# EAGLE board headstage-neuropix-64 (EAGLE 9.4.2)

Size 43.4 x 49.79 mm. Coordinates in mm from the lower left corner, seen from the top.
Outline: 0,0 43.4,0 43.4,49.79 0,49.79 0,0
Copper layers (1*16): Top 0.035mm / dielectric 1.5mm / Bottom 0.035mm
Design rules "default": minimum track width 6mil, minimum drill 0.35mm, track to track 6mil, track to pad 6mil, pad to pad 6mil, via to via 6mil, smd to smd 6mil, copper to edge 40mil, drill to drill 6mil, minimum pad ring 10mil, minimum via ring 8mil, stop-mask expansion 4mil, vias tented up to drill 0mil, thermal gap 10mil
Net classes: 1 thick: width 0.1 mm; 2 diff: width 0.076 mm, drill 0.1 mm, clearance 0.051 mm

## Footprints (pad centres in the part's own frame; a part is rotated, then mirrored left to right if it is on the bottom)
0201T = smd 0.3 x 0.4: 1 -0.3,0; 2 0.3,0
0402T = smd 0.4 x 0.6: 1 -0.533,0; 2 0.533,0
LED-0201T = smd 0.2 x 0.35: 1 -0.2,0; 2 0.2,0
0402T-DFN = smd 0.35 x 0.6: A -0.325,0; C 0.325,0
X_FL_R_SMT_1(02) = smd 0.5 x 0.7: P$1 0,-1.1 | smd 0.6 x 1.5: P$2 -1,0; P$4 1,0 | smd 0.5 x 0.6: P$3 0,1
2X05 = drill 1.016 octagon: 1 -5.08,-1.27; 2 -5.08,1.27; 3 -2.54,-1.27; 4 -2.54,1.27; 5 0,-1.27; 6 0,1.27; 7 2.54,-1.27; 8 2.54,1.27; 9 5.08,-1.27; 10 5.08,1.27
0603T = smd 0.7 x 0.9: 1 -0.82,0; 2 0.82,0
1210T = smd 1.5 x 2.5: 1 -1.3,0; 2 1.3,0
0805T = smd 0.7 x 1.3: 1 -1,0; 2 1,0
FE18-2 = drill 0.914: 1 -21.59,1.27 | drill 0.914 octagon: 2 -21.59,-1.27; 3 -19.05,1.27; 4 -19.05,-1.27; 5 -16.51,1.27; 6 -16.51,-1.27; 7 -13.97,1.27; 8 -13.97,-1.27; 9 -11.43,1.27; 10 -11.43,-1.27; 11 -8.89,1.27; 12 -8.89,-1.27; 13 -6.35,1.27; 14 -6.35,-1.27; 15 -3.81,1.27; 16 -3.81,-1.27; 17 -1.27,1.27; 18 -1.27,-1.27; 19 1.27,1.27; 20 1.27,-1.27; 21 3.81,1.27; 22 3.81,-1.27; 23 6.35,1.27; 24 6.35,-1.27; 25 8.89,1.27; 26 8.89,-1.27; 27 11.43,1.27; 28 11.43,-1.27; 29 13.97,1.27; 30 13.97,-1.27; 31 16.51,1.27; 32 16.51,-1.27; 33 19.05,1.27; 34 19.05,-1.27; 35 21.59,1.27; 36 21.59,-1.27
TP09R = smd 0.9 x 0.9: TP 0,0
TP06R = smd 0.6 x 0.6: TP 0,0
WQFN32-5X5 = smd 0.25 x 0.6: 1 1.75,2.4; 2 1.25,2.4; 3 0.75,2.4; 4 0.25,2.4; 5 -0.25,2.4; 6 -0.75,2.4; 7 -1.25,2.4; 8 -1.75,2.4; 17 -1.75,-2.4; 18 -1.25,-2.4; 19 -0.75,-2.4; 20 -0.25,-2.4; 21 0.25,-2.4; 22 0.75,-2.4; 23 1.25,-2.4; 24 1.75,-2.4 | smd 0.6 x 0.25: 9 -2.4,1.75; 10 -2.4,1.25; 11 -2.4,0.75; 12 -2.4,0.25; 13 -2.4,-0.25; 14 -2.4,-0.75; 15 -2.4,-1.25; 16 -2.4,-1.75; 25 2.4,-1.75; 26 2.4,-1.25; 27 2.4,-0.75; 28 2.4,-0.25; 29 2.4,0.25; 30 2.4,0.75; 31 2.4,1.25; 32 2.4,1.75 | smd 3.1 x 3.1: PAD 0,0
X2SON = smd 0.1 x 0.1: 1 -0.43,0.33; 2 -0.43,-0.33; 3 0.43,-0.33; 4 0.43,0.33 | smd 0.1 x 0.1 rotated 45: PAD 0,0
VBGA81-4X4 = smd 0.23 x 0.23: A1 1.6,1.6; A2 1.2,1.6; A3 0.8,1.6; A4 0.4,1.6; A5 0,1.6; A6 -0.4,1.6; A7 -0.8,1.6; A8 -1.2,1.6; A9 -1.6,1.6; B1 1.6,1.2; B2 1.2,1.2; B3 0.8,1.2; B4 0.4,1.2; B5 0,1.2; B6 -0.4,1.2; B7 -0.8,1.2; B8 -1.2,1.2; B9 -1.6,1.2; C1 1.6,0.8; C2 1.2,0.8; C3 0.8,0.8; C4 0.4,0.8; C5 0,0.8; C6 -0.4,0.8; C7 -0.8,0.8; C8 -1.2,0.8; C9 -1.6,0.8; D1 1.6,0.4; D2 1.2,0.4; D3 0.8,0.4; D4 0.4,0.4; D5 0,0.4; D6 -0.4,0.4; D7 -0.8,0.4; D8 -1.2,0.4; D9 -1.6,0.4; E1 1.6,0; E2 1.2,0; E3 0.8,0; E4 0.4,0; E5 0,0; E6 -0.4,0; E7 -0.8,0; E8 -1.2,0; E9 -1.6,0; F1 1.6,-0.4; F2 1.2,-0.4; F3 0.8,-0.4; F4 0.4,-0.4; F5 0,-0.4; F6 -0.4,-0.4; F7 -0.8,-0.4; F8 -1.2,-0.4; F9 -1.6,-0.4; G1 1.6,-0.8; G2 1.2,-0.8; G3 0.8,-0.8; G4 0.4,-0.8; G5 0,-0.8; G6 -0.4,-0.8; G7 -0.8,-0.8; G8 -1.2,-0.8; G9 -1.6,-0.8; H1 1.6,-1.2; H2 1.2,-1.2; H3 0.8,-1.2; H4 0.4,-1.2; H5 0,-1.2; H6 -0.4,-1.2; H7 -0.8,-1.2; H8 -1.2,-1.2; H9 -1.6,-1.2; J1 1.6,-1.6; J2 1.2,-1.6; J3 0.8,-1.6; J4 0.4,-1.6; J5 0,-1.6; J6 -0.4,-1.6; J7 -0.8,-1.6; J8 -1.2,-1.6; J9 -1.6,-1.6
XBGA6_1.2X0.8 = smd 0.23 x 0.23: A1 0.2,-0.4; A2 -0.2,-0.4; B1 0.2,0; B2 -0.2,0; C1 0.2,0.4; C2 -0.2,0.4
ASCO = smd 0.6 x 0.5: 1 -0.55,-0.4; 2 0.55,-0.4; 3 0.55,0.4; 4 -0.55,0.4
FH23-45S-0.3SHW(05) = smd 0.25 x 1.25: P$1 -6.6,0.068; P$2 -6.3,4.568; P$3 -6,0.068; P$4 -5.7,4.568; P$5 -5.4,0.068; P$6 -5.1,4.568; P$7 -4.8,0.068; P$8 -4.5,4.568; P$9 -4.2,0.068; P$10 -3.9,4.568; P$11 -3.6,0.068; P$12 -3.3,4.568; P$13 -3,0.068; P$14 -2.7,4.568; P$15 -2.4,0.068; P$16 -2.1,4.568; P$17 -1.8,0.068; P$18 -1.5,4.568; P$19 -1.2,0.068; P$20 -0.9,4.568; P$21 -0.6,0.068; P$22 -0.3,4.568; P$23 0,0.068; P$24 0.3,4.568; P$25 0.6,0.068; P$26 0.9,4.568; P$27 1.2,0.068; P$28 1.5,4.568; P$29 1.8,0.068; P$30 2.1,4.568; P$31 2.4,0.068; P$32 2.7,4.568; P$33 3,0.068; P$34 3.3,4.568; P$35 3.6,0.068; P$36 3.9,4.568; P$37 4.2,0.068; P$38 4.5,4.568; P$39 4.8,0.068; P$40 5.1,4.568; P$41 5.4,0.068; P$42 5.7,4.568; P$43 6,0.068; P$44 6.3,4.568; P$45 6.6,0.068
QFM8 = smd 1 x 1.4: P$1 -1.85,2.54; P$2 -1.85,0; P$3 -1.85,-2.54; P$4 1.85,-2.54; P$5 1.85,0; P$6 1.85,2.54 | smd 0.8 x 0.8: P$7 0,2.865; P$8 0,-2.865

## Placement (x,y rotation side)
C6  0.1uF  [0201T]  27.3,24.72 90 top
C7  4.7uF  [0402T]  26.76,25.82 0 top
C10  10nF  [0201T]  25.21,24.71 0 top
C11  0.1uF  [0201T]  25.21,25.31 0 top
C12  4.7uF  [0402T]  26.41,24.31 90 top
C13  0.1uF  [0201T]  23.41,17.51 0 top
C14  10nF  [0201T]  23.41,16.91 180 top
C15  10nF  [0201T]  27.81,21.71 270 top
C16  0.1uF  [0201T]  27.21,21.71 270 top
C17  4.7uF  [0402T]  27.01,20.71 0 top
C20  0.1uF  [0201T]  22.21,17.51 0 top
C21  10nF  [0201T]  22.21,16.91 0 top
C22  10nF  [0201T]  21.61,23.91 180 top
C23  0.1uF  [0201T]  21.61,24.51 180 top
C24  15uF  [0402T]  20.61,24.31 270 top
C25  0.1uF  [0201T]  23.01,24.11 270 top
C26  47nF  [0201T]  24.01,23.91 180 top
C37  1uF  [0402T]  28.21,18.51 270 top
C38  10uF  [0402T]  29.41,19.51 0 top
C39  1uF  [0402T]  28.21,16.51 270 top
C40  10uF  [0402T]  29.41,17.51 0 top
C43  2.2nF  [0201T]  24.61,17.31 180 bottom
C44  4.7nF  [0201T]  24.61,16.71 180 bottom
C45  10nF  [0201T]  24.61,16.11 180 bottom
C46  22nF  [0201T]  26.01,16.71 180 bottom
C47  47nF  [0201T]  26.01,17.91 180 bottom
C48  0.1uF  [0201T]  26.01,16.11 180 bottom
C49  1uF  [0201T]  26.01,17.31 180 bottom
C50  4.7nF  [0201T]  23.61,12.31 90 bottom
C51  10nF  [0201T]  24.21,12.31 90 bottom
C52  22nF  [0201T]  24.81,12.31 90 bottom
C53  0.47uF  [0201T]  25.41,12.31 90 bottom
C54  10uF  [0402T]  26.21,12.11 90 bottom
C55  1uF  [0402T]  28.21,14.51 90 top
C56  10uF  [0402T]  29.41,15.51 0 top
C58  4.7nF  [0201T]  22.41,13.11 0 bottom
C59  10nF  [0201T]  22.41,12.51 0 bottom
C60  22nF  [0201T]  22.41,11.91 0 bottom
C61  47nF  [0201T]  22.41,11.31 0 bottom
C62  0.47uF  [0201T]  22.41,10.71 0 bottom
C65  4.7nF  [0201T]  22.01,16.11 0 bottom
C66  10nF  [0201T]  22.01,16.71 0 bottom
C67  22nF  [0201T]  22.01,17.31 0 bottom
C68  0.47uF  [0201T]  22.01,17.91 0 bottom
C69  2.2uF  [0402T]  28.01,12.71 270 top
C70  4.7uF  [0402T]  29.21,11.71 0 top
C71  10nF  [0201T]  19.81,10.91 0 top
C72  1uF  [0402T]  28.21,20.31 270 top
C73  15uF  [0402T]  29.41,21.71 0 top
D7  XZVGR155W  [LED-0201T]  26.06,15.02 90 top
D35  SESD0402X1UN-0020-090  [0402T-DFN]  22.35,25.71 90 top
J69  X.FL-R-SMT-1(02)  [X_FL_R_SMT_1(02)]  23.68,27.98 0 top
JP1  [2X05]  3.89,18.06 90 top
L2  BLM18KG601SN1D  [0603T]  29.24,22.79 0 top
L4  CBC3225T101MR  [1210T]  28.01,27.71 0 top
L6  BLM15PX601SN1D  [0402T]  27.41,23.31 90 top
L8  BLM15PX601SN1D  [0402T]  21.01,25.51 180 top
L10  BLM15PX601SN1D  [0402T]  26.41,13.31 180 bottom
L12  LQM21PN1R0NGRD  [0805T]  26.81,12.71 90 top
L35  CIG21L4R7MNE  [0805T]  29.27,24.9 270 top
R10  1k  [0201T]  25.22,26.06 0 top
R25  49.9  [0201T]  24.01,24.71 0 top
R27  10k  [0201T]  26.61,22.91 270 top
R30  100k  [0201T]  26.61,21.71 270 top
R33  10k  [0201T]  25.21,23.91 180 top
R35  1k  [0201T]  23.62,25.91 0 top
R37  2k  [0201T]  26.72,15.02 90 top
R38  10k  [0201T]  10.51,11.05 90 top
R39  10k  [0201T]  10.51,13.59 90 top
R40  10k  [0201T]  10.51,16.13 90 top
R41  4.7k  [0201T]  10.51,19.94 90 top
R43  1k  [0201T]  9.24,12.32 270 top
R44  4.7k  [0201T]  10.51,18.67 90 top
R54  10k  [0201T]  26.01,14.11 0 bottom
R55  10k  [0201T]  26.01,14.71 0 bottom
R56  10k  [0201T]  26.01,15.31 180 bottom
R57  10k  [0201T]  20.41,13.51 90 top
SV1  [FE18-2]  38.53,25.4 90 top
TP3  [TP09R]  30.97,24.05 90 top
TP4  [TP09R]  19.89,22.89 0 top
TP9  [TP06R]  7.97,14.86 90 top
TP10  [TP06R]  7.97,13.59 90 top
TP11  [TP06R]  7.97,12.32 90 top
TP12  [TP06R]  7.97,9.78 90 top
TP13  [TP06R]  7.97,8.51 90 top
TP14  gnd  [TP06R]  7.97,16.13 90 top
TP15  VCC  [TP06R]  7.97,17.4 90 top
U9  DS90UB913A_WQFN  [WQFN32-5X5]  23.37,20.71 270 top
U13  TLV70733  [X2SON]  29.41,18.51 0 top
U14  10M08DC  [VBGA81-4X4]  23.21,13.92 0 top
U15  TLV70733  [X2SON]  29.41,16.51 0 top
U17  TLV70725  [X2SON]  29.41,14.31 0 top
U18  TPS62621  [XBGA6_1.2X0.8]  29.41,12.91 270 top
U19  ASCO-50.000MHZ-EK-T3  [ASCO]  19.81,12.11 0 top
U20  TLV70712  [X2SON]  29.41,20.71 0 top
U$2  CONNFPCBOTTOM45POS0.30MMR/A  [FH23-45S-0.3SHW(05)]  25.01,8.91 180 top
U$3  LMK61E2  [QFM8]  17.41,18.11 0 top

## Library data of the parts
C6 = jonnew; PARTNO: C0603X5R1C104K030BC
C7 = jonnew; PARTNO: CL05A475MO5NUNC
C10 C11 C13-C16 C20-C23 C43-C48 C50-C52 C58-C61 C65-C67 C71 D7 D35 J69 L2 L4 L12 L35 R10 R25 R27 R30 R33 R35 R37-R41 R43 R44 R54-R57 TP3 TP4 TP9-TP15 U9 U13-U15 U17-U20 U$2 U$3 = jonnew
C12 C17 = jonnew; PARTNO: GRM155R61A475MEAAD
C24 = jonnew; PARTNO: CL05A226MQ5QUNC
C25 = jonnew; PARTNO: C1005X7R1H104K050BB
C26 = jonnew; PARTNO: C1005X7R1H473K050BB
C37 C39 C55 C69 C70 C72 = jonnew; PARTNO: CL05A105KO5NNNC
C38 C40 C54 C56 = jonnew; PARTNO: CL05A106MQ5NUNC
C49 = jonnew; PARTNO: CL03A105MP3ZSNH
C53 C62 C68 = jonnew; PARTNO: GRM033R60J474KE90D
C73 = jonnew; PARTNO: CL05A226MQ6ZUN8
JP1 = pinhead
L6 L8 L10 = jonnew; PARTNO: BLM15PX601SN1D
SV1 = con-lsta; OC_FARNELL: unknown; OC_NEWARK: unknown

## Nets
$N324: C50.1 C51.1 C52.1 C53.1 C54.1 L10.2 U14.A8
+1V2: C43.1 C44.1 C45.1 C46.1 C47.1 C48.1 C49.1 C73.1 L10.1 U14.B2 U14.B9 U14.H2 U14.H8 U20.1
+1V8: C13.1 C14.1 C15.1 C16.1 C17.1 C70.1 L6.1 L8.1 L12.1 R27.1 U9.11 U9.28 U18.C1
+2V5: C56.1 C65.1 C66.1 C67.1 C68.1 C72.1 U14.B1 U14.B8 U14.J1 U14.J9 U17.1 U20.3 U20.4
+3V3: C20.1 C21.1 C40.1 C58.1 C59.1 C60.1 C61.1 C62.1 C71.1 JP1.4 R33.1 R37.1 R38.1 R39.1 R40.1 R41.2 R44.1 R54.1 R55.1 R56.1 TP14.TP U9.25 U14.D5 U14.E4 U14.E6 U14.F5 U15.1 U19.1 U19.4
+3V3_AN: C38.1 U13.1
AGND: C37.2 C38.2 U13.2 U13.PAD
CONF_DONE: R56.2 U14.A2
CONFIG_SEL: R57.1 U14.C6
DAC_CS: U14.A5
DATA1: U14.C7
DATA2: U14.C3
DATA3: U14.A7
DATA4: U14.B6
DIN0: U9.19 U14.J6
DIN1: U9.20 U14.G6
DIN2: U9.21 U14.H7
DIN3: U9.22 U14.J7
DIN4: U9.23 U14.G8
DIN5: U9.24 U14.G9
DIN6: U9.26 U14.F7
DIN7: U9.27 U14.E7
DIN8: U9.29 U14.E8
DIN9: U9.30 U14.C8
DIN10: U9.31 U14.C5
DIN11: U9.32 U14.C4
ENV1: U14.B5
ENV2: U14.C2
ENV3: U14.D9
ENV4: U14.B7
ESTIM_POW_EN: U14.A6
GND: C6.2 C7.2 C10.2 C11.2 C12.2 C13.2 C14.2 C15.2 C16.2 C17.2 C20.2 C21.2 C22.2 C23.2 C24.2 C39.2 C40.2 C43.2 C44.2 C45.2 C46.2 C47.2 C48.2 C49.2 C50.2 C51.2 C52.2 C53.2 C54.2 C55.2 C56.2 C58.2 C59.2 C60.2 C61.2 C62.2 C65.2 C66.2 C67.2 C68.2 C69.2 C70.2 C71.2 C72.2 C73.2 D35.A J69.P$2 J69.P$3 J69.P$4 JP1.2 JP1.10 R25.1 R30.2 R43.2 R57.2 TP3.TP TP15.TP U9.6 U9.7 U9.PAD U14.A1 U14.A9 U14.B4 U14.D1 U14.D7 U14.E5 U14.E9 U14.F4 U14.F6 U14.H1 U14.H5 U14.H9 U15.2 U15.PAD U17.2 U17.PAD U18.C2 U19.2 U20.2 U20.PAD U$3.P$3
GPIO0: TP4.TP U9.15 U14.A3
GPIO1: U9.16 U14.H6
HSYNC: U9.1 U14.F2
IMU_SCL: R41.1 U14.E3
IMU_SDA: U14.F9
JTAGEN: R38.2 U14.D2
LED_BLANK: U14.C9
LED_LATCH: U14.J8
MIDFILT: L4.1 L35.2 R10.1 R35.2
MOSI: U14.A4
N$4: JP1.7
N$13: C6.1 C7.1 L2.1 L4.2 R10.2
N$28: C25.2 U9.13
N$29: D7.2 R37.2
N$30: R33.2 U9.9
N$31: C26.2 U9.12
N$32: C26.1 R25.2
N$33: R27.2 R30.1 U9.8
N$34: C10.1 C11.1 C12.1 L6.2 U9.10
N$35: C22.1 C23.1 C24.1 L8.2 U9.14
N$37: U14.D8 U19.3
N$45: R54.2 U14.D6
N$46: L12.2 U18.B1
NSTATUS: R55.2 U14.B3
PCLK: U9.3 U14.G2
POT_CS: U14.G7
RHD_CLK_N [diff]: U14.G5
RHD_CLK_P [diff]: U14.G4
RHD_CS_N [diff]: U14.J2
RHD_CS_P [diff]: U14.H3
RHD_MISO_N [diff]: U14.J5
RHD_MISO_P [diff]: U14.J4
RHD_MOSI_N [diff]: U14.H4
RHD_MOSI_P [diff]: U14.J3
SCL: R44.2 U9.4 U14.G3
SCLK: U14.F3
SDA: U9.5 U14.F8
SIGOUT: C25.1 D35.C J69.P$1 L35.1 R35.1
STATUS: D7.1 U14.C1
STIM_NULL: U14.F1
TCK: JP1.1 R43.1 TP11.TP U14.D4
TDI: JP1.9 R40.2 TP12.TP U14.E1
TDO: JP1.3 TP13.TP U14.E2
TMS: JP1.5 R39.2 TP10.TP U14.D3
VCOAX: C37.1 C39.1 C55.1 C69.1 L2.2 TP9.TP U13.3 U13.4 U15.3 U15.4 U17.3 U17.4 U18.A1 U18.A2 U18.B2
VSYNC: U9.2 U14.G1

## Tracks (layer width: path | path; a pad name or v marks a point on that pad's centre or on a via)
$N324  (6 unrouted)
+1V2  (13 unrouted)
+1V8  (12 unrouted)
+2V5  (12 unrouted)
+3V3  (28 unrouted)
+3V3_AN  (1 unrouted)
AGND  (3 unrouted)
CONF_DONE  (1 unrouted)
CONFIG_SEL  (1 unrouted)
DIN0  (1 unrouted)
DIN1  (1 unrouted)
DIN2  (1 unrouted)
DIN3  (1 unrouted)
DIN4  (1 unrouted)
DIN5  (1 unrouted)
DIN6  (1 unrouted)
DIN7  (1 unrouted)
DIN8  (1 unrouted)
DIN9  (1 unrouted)
DIN10  (1 unrouted)
DIN11  (1 unrouted)
GND  (80 unrouted)
GPIO0  (2 unrouted)
GPIO1  (1 unrouted)
HSYNC  (1 unrouted)
IMU_SCL  (1 unrouted)
JTAGEN  (1 unrouted)
MIDFILT  (3 unrouted)
N$13  (4 unrouted)
N$28  (1 unrouted)
N$29  (1 unrouted)
N$30  (1 unrouted)
N$31  (1 unrouted)
N$32  (1 unrouted)
N$33  (2 unrouted)
N$34  (4 unrouted)
N$35  (4 unrouted)
N$37  (1 unrouted)
N$45  (1 unrouted)
N$46  (1 unrouted)
NSTATUS  (1 unrouted)
PCLK  (1 unrouted)
SCL  (2 unrouted)
SDA  (1 unrouted)
SIGOUT  (4 unrouted)
STATUS  (1 unrouted)
TCK  (3 unrouted)
TDI  (3 unrouted)
TDO  (2 unrouted)
TMS  (3 unrouted)
VCOAX  (14 unrouted)
VSYNC  (1 unrouted)